# EAGLE board MEMS-preamp_v06 (EAGLE 8.5.0)
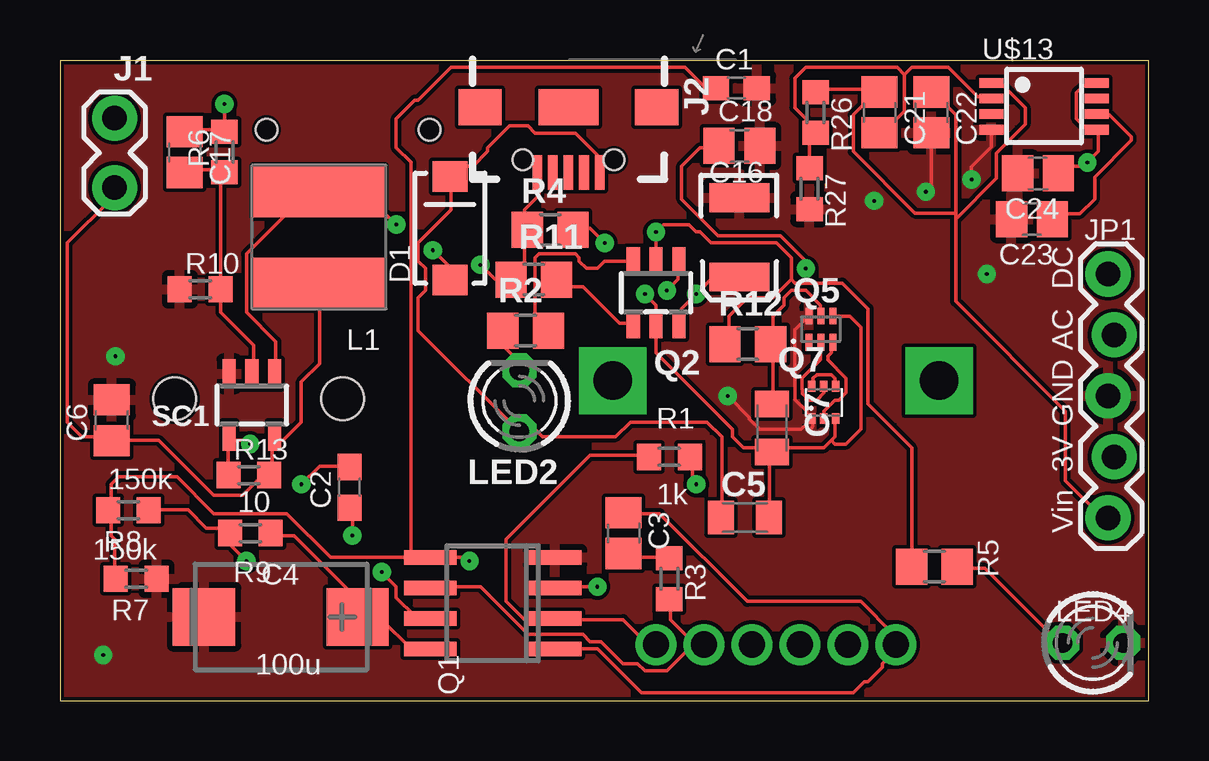
[diagram p0: board, top side]
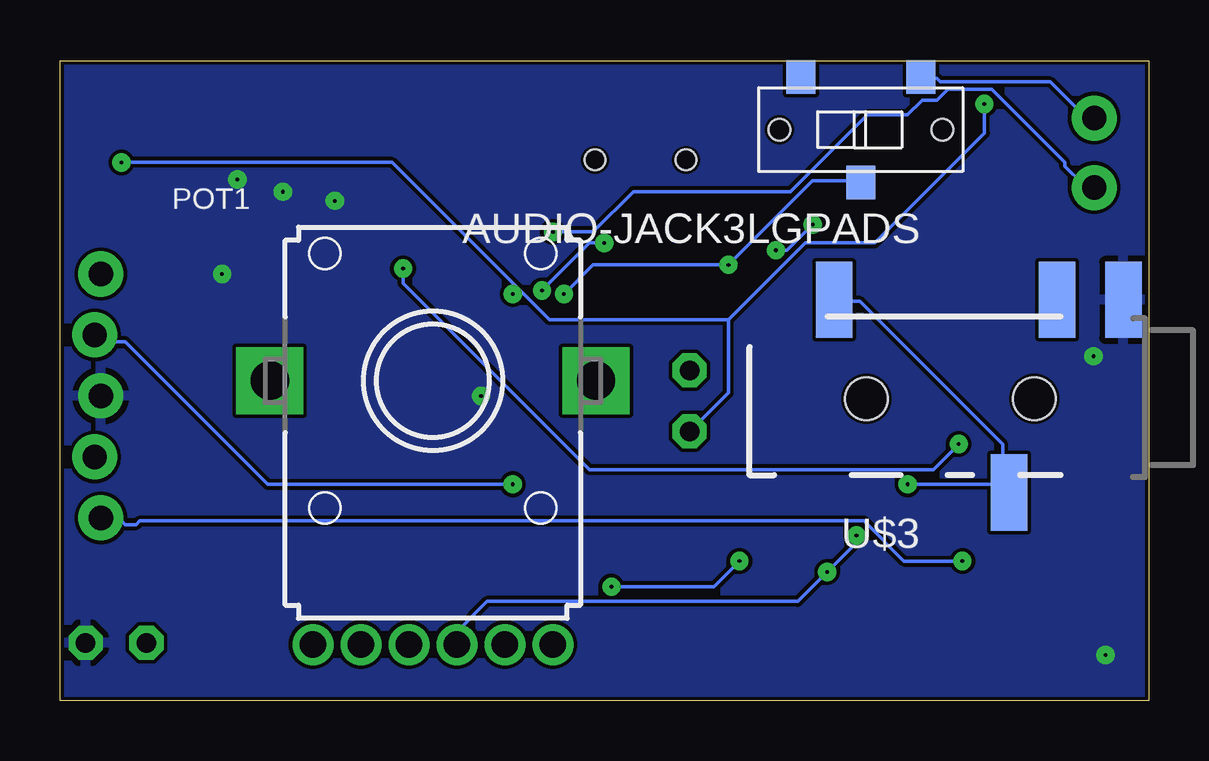
[diagram p1: board, bottom side, seen from below]

Size 45.39 x 26.66 mm. Coordinates in mm from the lower left corner, seen from the top.
Outline: 0,0 45.39,0 45.39,26.66 0,26.66 0,0
Copper layers (1*16): Top 0.035mm / dielectric 1.5mm / Bottom 0.035mm
Design rules "default *": minimum track width 6mil, minimum drill 6mil, track to track 6mil, track to pad 6mil, pad to pad 6mil, via to via 6mil, smd to smd 6mil, copper to edge 6mil, drill to drill 6mil, minimum pad ring 12mil, minimum via ring 12mil, stop-mask expansion 4mil, vias tented up to drill 0mil, thermal gap 10mil

## Footprints (pad centres in the part's own frame; a part is rotated, then mirrored left to right if it is on the bottom)
C0603 = smd 1.1 x 1: 1 -0.85,0; 2 0.85,0
C0805 = smd 1.3 x 1.5: 1 -0.85,0; 2 0.85,0
CT7343 = smd 2.6 x 2.4: + -3.2,0; - 3.2,0
C0805K = smd 1.1 x 1.4: 1 -1,0; 2 1,0
EIA3528 = smd 1.2 x 2.5: A 1.65,0; C -1.65,0
SMA-DIODE = smd 1.27 x 1.47: A -2.15,0; C 2.15,0
1X02_LOCK = drill 1.016 pad 1.88: 1 -0.178,0; 2 2.718,0
USB-B-MICRO-SMD_RED_PASTE = smd 1.45 x 0.4: D+ 2.725,0; D- 2.725,0.65; GND 2.725,-1.3; ID 2.725,-0.65; VBUS 2.725,1.3 | smd 1.5 x 1.8: SHIELD1 0,3.685; SHIELD2 0,-3.685 | smd 1.5 x 2.5: SHIELD3 0,0 | hole 0.85: 2.2,1.9; 2.2,-1.9
1X05_LOCK = drill 1.016 pad 1.88: 1 0,0.127; 2 2.54,-0.127; 3 5.08,0.127; 4 7.62,-0.127; 5 10.16,0.127
CR54 = smd 5.5 x 2.15: P$1 0,1.92; P$2 0,-1.92
LED3MM = drill 0.813 octagon: A -1.27,0; K 1.27,0
PTV112 = drill 1.1 pad 1.676: 1.1 -3,-11; 1.2 -5,-11; 1.3 5,-11; 2.1 -1,-11; 2.2 1,-11; 2.3 3,-11 | drill 1.6 pad 2.8 square: M1 -6.8,0; M2 6.8,0
SO08 = smd 0.6 x 2.2: 1 -1.905,-2.6; 2 -0.635,-2.6; 3 0.635,-2.6; 4 1.905,-2.6; 5 1.905,2.6; 6 0.635,2.6; 7 -0.635,2.6; 8 -1.905,2.6
SOT23-6 = smd 0.55 x 1.2: 1 -0.95,-1.3; 2 0,-1.3; 3 0.95,-1.3; 4 0.95,1.3; 5 0,1.3; 6 -0.95,1.3
WSON-6 = smd 0.3 x 0.7: 1 -0.5,-0.55; 2 0,-0.55; 3 0.5,-0.55; 4 0.5,0.55; 5 0,0.55; 6 -0.5,0.55
SOT-563 = smd 0.3 x 0.45: 1 -0.5,-0.675; 2 0,-0.675; 3 0.5,-0.675; 4 0.5,0.675; 5 0,0.675; 6 -0.5,0.675
R0603 = smd 1 x 1.1: 1 -0.85,0; 2 0.85,0
R0805 = smd 1.3 x 1.5: 1 -0.95,0; 2 0.95,0
SOT23-5 = smd 0.55 x 1.2: 1 -0.95,-1.3; 2 0,-1.3; 3 0.95,-1.3; 4 0.95,1.3; 5 -0.95,1.3
SWITCH_SPDT_CL-SB-12B = smd 1.2 x 1.4: P$1 -2.5,-2.2; P$2 0,2.2; P$3 2.5,-2.2 | hole 0.9: -3.4,0; 3.4,0
TRRS_SJ-43514-SMT-TR = smd 1.524 x 3.175: EARTH -2.114,-5.271; RING1 2.644,2.759; RING2 0.66,-5.271; TIP 9.948,-5.271 | hole 1.778: 1.6,-1.15; 8.6,-1.15
MSOP-8 = smd 0.4 x 1: 1 -0.975,-2.2; 2 -0.325,-2.2; 3 0.325,-2.2; 4 0.975,-2.2; 5 0.975,2.2; 6 0.325,2.2; 7 -0.325,2.2; 8 -0.975,2.2

## Placement (x,y rotation side)
C1  10uF  [C0603]  28.19,25.53 0 top
C2  10uF  [C0603]  12.06,8.89 90 top
C3  10uF  [C0805]  23.5,6.98 270 top
C4  100u  [CT7343]  9.21,3.49 180 top
C5  10uF  [C0805K]  28.55,7.63 0 top
C6  10uF  [C0805]  2.16,11.68 90 top
C7  0.1uF  [C0805K]  29.68,11.37 270 top
C16  68uF  [EIA3528]  28.32,19.3 270 top
C17  2.2pf  [C0805]  5.21,22.86 270 top
C18  56nf  [C0805]  28.32,23.11 0 top
C21  10nF  [C0805]  34.16,24.51 270 top
C22  10uF  [C0805]  36.32,24.51 270 top
C23  10nF  [C0805]  40.51,20.07 180 top
C24  10uF  [C0805]  40.77,21.97 180 top
D1  10BQ015  [SMA-DIODE]  16.26,19.69 90 top
J1  Battery  [1X02_LOCK]  2.28,21.56 90 top
J2  [USB-B-MICRO-SMD_RED_PASTE]  21.19,24.73 270 top
JP1  Adafruit-SPW2430  [1X05_LOCK]  43.81,7.62 90 top
L1  2.7uH  [CR54]  10.79,19.3 180 top
LED2  [LED3MM]  19.15,12.49 90 top
LED4  [LED3MM]  43.05,2.41 0 top
POT1  50k  [PTV112]  29.84,13.33 0 bottom
Q1  OPA2134  [SO08]  18.03,4.06 90 top
Q2  BQ21040  [SOT23-6]  24.85,17 180 top
Q5  BQ297X  [WSON-6]  31.72,15.48 0 top
Q7  DMN2400  [SOT-563]  31.84,12.43 0 top
R1  1k  [R0603]  25.4,10.16 180 top
R2  1k  [R0805]  19.41,15.42 0 top
R3  1k  [R0603]  25.4,5.08 270 top
R4  10k  [R0805]  20.43,19.62 0 top
R5  390  [R0805]  36.45,5.59 180 top
R6  1M  [R0603]  6.86,22.86 90 top
R7  150k  [R0603]  3.17,5.08 180 top
R8  150k  [R0603]  2.86,7.94 0 top
R9  10  [R0603]  7.94,6.98 180 top
R10  100k  [R0603]  5.84,17.15 0 top
R11  10k  [R0805]  19.75,17.54 0 top
R12  330  [R0805]  28.67,14.86 0 top
R13  15k  [R0603]  7.87,9.4 0 top
R26  91.2k  [R0603]  31.5,24.51 270 top
R27  100k  [R0603]  31.24,21.34 270 top
SC1  VREG12_SOT23-5  [SOT23-5]  8,12.32 180 top
SW1  SPDT  [SWITCH_SPDT_CL-SB-12B]  12.01,23.8 180 bottom
U$3  AUDIO-JACK3LGPADS  [TRRS_SJ-43514-SMT-TR]  3.17,11.43 180 bottom
U$13  TPS7A49  [MSOP-8]  41.02,24.77 270 top

## Library data of the parts
C1-C3 C5-C7 C17 C18 C21-C24 = adafruit
C4 = rcl
C16 D1 L1 = SparkFun
J1 = SparkFun-Connectors; G: -; V: +
J2 = SparkFun-Connectors; PROD_ID: CONN-11752
JP1 = SparkFun-Connectors; CON1: Vin; CON2: 3V; CON3: GND; CON4: AC; CON5: DC
LED2 LED4 = led
POT1 = CMU-ArtFab; AVAILABILITY: Unavailable; DESCRIPTION: Alt# Tce-10111410; MF: STMicroelectronics; MP: PTV112; PACKAGE: None; PRICE: None
Q1 = linear; IC_NAME: OPA2134
Q2 Q5 Q7 R1-R13 R26 R27 SC1 SW1 U$3 U$13 = CMU-ArtFab

## Nets
+12V: C21.1 C22.1 JP1.1 R8.2 R9.2 R26.1 U$13.1
GND: C1.2 C4.- C6.2 C16.C C18.2 C22.2 C23.2 C24.2 JP1.3 LED4.K Q1.4 Q5.6 Q7.1 R7.1 R10.1 R27.2 SC1.3 U$3.EARTH U$13.4
GND2: C5.2 C7.2 J2.GND Q2.5 Q5.4 Q7.3 R4.1 R11.1 SW1.P$2
GROU[: POT1.2.3 Q1.6 R3.2
N$1: C4.+ Q1.8 R9.1
N$2: LED4.A R5.1
N$3: JP1.4 R1.1
N$4: C3.2 R3.1
N$5: POT1.1.3 Q1.2 R1.2
N$6: J1.2 SW1.P$1
N$7: C2.2 U$3.RING1 U$3.TIP
N$8: C1.1 Q1.3 Q1.5 R7.2 R8.1
N$9: C3.1 POT1.1.2 Q1.1
N$10: C2.1 POT1.2.2 Q1.7
N$11: LED2.K R2.1
N$12: D1.A L1.P$2 SC1.1
N$13: C18.1 R13.1 SC1.4
N$14: C17.2 R6.1 R10.2 SC1.2
N$15: Q2.3 R2.2
N$16: Q2.1 R4.2
N$17: Q2.4 R11.2
N$18: C7.1 Q5.5 R12.2
N$19: Q7.4 Q7.6
N$20: Q5.2 Q7.5
N$22: Q5.3 Q7.2
N$47: C21.2 R26.2 R27.1 U$13.2
N$48: C23.1 U$13.6
V+: C5.1 C16.A C17.1 C24.1 D1.C J2.VBUS LED2.A Q2.6 R6.2 U$13.5 U$13.8
VBAT: C6.1 J1.1 L1.P$1 Q2.2 R5.2 R12.1 R13.2 SC1.5

## Tracks (layer width: path | path; a pad name or v marks a point on that pad's centre or on a via)
+12V  (via drill 0.15)
  Top 0.152: 33.53,25.48 34.14,25.48 C21.1 33.53,25.48 | 33.53,25.48 31.55,25.48 R26.1 | U$13.1 38.86,25.63 39.32,25.63 40.23,24.71 40.23,24.01 39.04,22.82 39.04,21.77 37.34,20.07 | C22.1 36.42,25.32 37.34,24.41 37.34,20.32 | 33.53,25.48 33.53,24.87 33.07,24.41 33.07,22.89 35.64,20.32 37.34,20.32 | R8.2 3.81,7.95 5.33,7.95 6.1,7.19 6.86,7.19 7.01,7.04 R9.2 7.16,6.88 7.16,6.43 v7.77,5.82 | 37.34,20.07 37.34,16.64 41.91,12.06 41.91,9.17 43.59,7.49 JP1.1 | 37.34,20.07 37.34,20.32
  Bottom 0.152: v7.77,5.82 10.21,5.82 11.89,7.49 42.06,7.49 42.22,7.34 42.67,7.34 42.82,7.49 43.59,7.49 JP1.1
GND  (via drill 0.15)
  Top 0.152: 31.34,11.38 31.39,11.46 31.39,11.61 Q7.1 31.12,11.55 | v27.84,12.7 28.75,11.79 28.75,11.72 29.17,11.3 30.88,11.3 31.12,11.55 | 31.12,11.55 31.12,12.06 30.63,12.55 30.63,15.45 Q5.6 | v36.09,21.21 36.32,21.44 C22.2 | v38,21.72 38,22.25 38.82,23.07 U$13.4
  other vias: 2.31,14.35 1.8,1.91 33.93,20.83 38.63,17.78
  pour Bottom: -2.54,-1.91 47.62,-1.91 47.62,28.58 -2.54,28.58
  pour Top: -1.27,27.31 46.35,27.31 46.35,-0.64 -1.27,-0.64
GND2  (via drill 0.15)
  Top 0.152: J2.GND 19.96,21.97 19.96,21.06 19.36,20.45 19.36,19.69 R4.1 19.36,19.53 19.36,18.01 18.9,17.55 R11.1 18.75,17.55 18.14,17.55 v17.53,18.16 | 32.16,10.85 31.85,10.54 29.87,10.54 29.72,10.39 C7.2 | 32.16,10.85 32.31,11 32.31,11.61 Q7.3 | 32.16,10.85 32.31,10.69 32.77,10.69 33.38,11.3 33.38,15.57 32.92,16.03 32.31,16.03 Q5.4 | C7.2 29.57,10.39 29.41,10.54 28.5,10.54 28.04,11 28.04,11.3 24.84,14.5 24.84,15.57 Q2.5 24.84,15.72 24.84,16.48 v24.38,16.94 | C5.2 29.57,7.64 29.57,10.24 C7.2
  Bottom 0.152: SW1.P$2 12.04,21.67 14.02,21.67 v17.53,18.16 23.16,18.16 v24.38,16.94
GROU[
  Top 0.152: 26.52,2.46 26.82,2.46 POT1.2.3 26.52,2.46 | 26.52,2.46 26.36,2.46 25.45,3.38 25.45,4.14 R3.2 | 26.52,2.46 25.3,1.25 24.38,1.25 24.08,1.55 23.47,1.55 22.55,2.46 22.1,2.46 21.79,2.77 19.51,2.77 17.53,4.75 15.54,4.75 Q1.6
N$1
  Top 0.152: R9.1 8.84,6.88 9.75,6.88 12.34,4.29 12.34,3.53 C4.+ 12.5,3.38 13.41,3.38 14.63,2.16 Q1.8
N$2
  Top 0.152: R5.1 37.49,5.51 38.56,5.51 41.76,2.31 LED4.A
N$3  (via drill 0.15)
  Top 0.152: v26.52,9.02 26.36,9.17 26.36,10.08 R1.1
  Bottom 0.152: v26.52,9.02 36.73,9.02 42.67,14.96 43.74,14.96 43.89,15.11 JP1.4
N$4
  Top 0.152: R3.1 25.3,5.97 23.77,5.97 23.62,6.12 C3.2
N$5
  Top 0.152: R1.2 24.54,10.24 22.1,10.24 18.59,6.73 18.59,4.14 19.36,3.38 20.57,3.38 Q1.2 20.73,3.38 23.47,3.38 24.38,2.46 24.84,2.46 POT1.1.3
N$6
  Bottom 0.152: SW1.P$1 9.45,25.93 8.84,25.93 8.69,25.78 4.12,25.78 2.74,24.41 2.29,24.41 J1.2
N$7  (via drill 0.15)
  Top 0.152: v10.06,9.02 10.82,9.78 12.04,9.78 C2.2
  Bottom 0.152: v10.06,9.02 6.25,9.02 6.1,8.87 | 6.1,8.87 5.94,8.71 U$3.RING1 6.1,8.87 | 6.1,8.87 6.1,10.69 12.04,16.64 13.11,16.64 U$3.TIP
N$8  (via drill 0.15)
  Top 0.152: R7.2 2.29,5.21 2.29,6.73 2.13,6.88 2.13,7.8 R8.1 2.13,7.95 2.13,9.02 2.44,9.32 4.88,9.32 6.4,7.8 9.45,7.8 11.28,5.97 14.33,5.97 14.63,6.27 | 14.63,6.27 14.63,22.43 14.02,23.04 14.02,24.26 14.78,25.02 14.94,25.02 16.31,26.39 26.06,26.39 26.82,25.63 27.28,25.63 C1.1 | 14.63,6.27 14.94,5.97 Q1.5 16.92,5.97 v17.07,5.82 | v22.4,4.75 20.73,4.75 Q1.3
  Bottom 0.152: v22.4,4.75 18.14,4.75 v17.07,5.82
N$9
  Top 0.152: C3.1 23.62,7.8 24.99,7.8 28.65,4.14 33.38,4.14 34.75,2.77 34.75,2.46 POT1.1.2 34.75,2.31 34.75,2.01 34.29,1.55 34.29,1.4 33.68,0.79 33.53,0.79 33.07,0.33 24.23,0.33 22.4,2.16 Q1.1
N$10  (via drill 0.15)
  Top 0.152: v12.19,6.88 12.19,7.95 C2.1 | v13.41,5.36 14.02,4.75 14.02,4.29 14.78,3.53 15.39,3.53 Q1.7
  Bottom 0.152: v12.19,6.88 12.19,6.58 v13.41,5.36 14.63,4.14 27.58,4.14 28.8,2.92 28.8,2.46 POT1.2.2
N$11
  Top 0.152: R2.1 18.59,15.27 18.59,14.66 19.05,14.2 19.05,13.89 LED2.K
N$12  (via drill 0.15)
  Top 0.152: SC1.1 8.99,13.74 8.99,14.96 7.77,16.18 7.77,18.62 10.36,21.21 10.67,21.21 L1.P$2 10.82,21.21 12.65,21.21 v14.02,19.84 | v15.54,18.77 16.15,18.16 16.15,17.55 D1.A
  Bottom 0.152: v15.54,18.77 15.09,18.77 v14.02,19.84
N$13  (via drill 0.15)
  Top 0.152: 7.01,10.85 7.01,11 SC1.4 7.01,10.85 | 7.01,10.85 7.01,9.47 R13.1 | v31.09,18.01 31.09,18.31 30.02,19.38 27.43,19.38 25.91,20.9 25.91,22.28 26.67,23.04 27.43,23.04 C18.1 | v7.92,10.69 7.77,10.85 7.01,10.85
  Bottom 0.152: v31.09,18.01 31.09,17.4 23.32,9.63 8.99,9.63 v7.92,10.69
N$14
  Top 0.152: SC1.2 8.08,13.74 8.08,14.81 6.71,16.18 6.71,17.09 R10.2 6.71,17.25 6.71,21.82 6.86,21.97 R6.1 6.86,22.12 5.33,22.12 C17.2
N$15
  Top 0.152: Q2.3 23.77,18.31 22.71,18.31 22.4,18.01 21.95,18.01 21.64,18.31 21.64,18.47 21.49,18.62 19.96,18.62 19.81,18.47 19.81,15.88 20.27,15.42 R2.2
N$16  (via drill 0.15)
  Top 0.152: v25.3,17.09 25.76,17.55 25.76,18.16 Q2.1 | v22.71,19.08 22.1,19.69 21.49,19.69 R4.2
  Bottom 0.152: v25.3,17.09 23.32,19.08 v22.71,19.08
N$17
  Top 0.152: Q2.4 23.77,15.72 23.32,15.72 21.79,17.25 20.88,17.25 20.73,17.4 R11.2
N$18
  Top 0.152: Q5.5 31.7,16.18 31.7,16.48 31.09,17.09 30.48,17.09 30.18,16.79 30.18,16.48 29.72,16.03 29.72,14.96 R12.2 29.72,14.81 29.72,12.37 C7.1
N$19
  Top 0.152: Q7.6 31.39,13.13 31.39,13.44 31.55,13.59 32.16,13.59 32.31,13.44 32.31,13.13 Q7.4
N$20
  Top 0.152: Q7.5 31.85,12.98 31.85,12.83 31.55,12.52 31.09,12.52 31.09,12.66 30.96,12.79 30.96,12.96 30.94,12.98 30.94,13.44 31.7,14.2 31.7,14.81 Q5.2
N$22
  Top 0.152: Q7.2 31.85,11.76 31.85,12.06 32.31,12.52 32.46,12.52 32.77,12.83 32.77,13.44 32,14.2 32,14.35 32.16,14.5 32.16,14.81 Q5.3
N$47
  Top 0.152: R27.1 31.24,23.5 31.39,23.65 R26.2 31.39,23.8 31.09,24.11 31.09,24.26 30.63,24.71 30.63,25.93 31.09,26.39 34.9,26.39 35.2,26.09 | 35.2,26.09 35.51,26.39 37.03,26.39 38.25,25.17 38.71,25.17 U$13.2 | 35.2,26.09 35.2,24.56 34.29,23.65 C21.2
N$48
  Top 0.152: U$13.6 43.28,24.41 43.74,24.41 44.65,23.5 44.65,23.34 43.13,21.82 43.13,20.9 42.52,20.3 41.6,20.3 41.45,20.14 C23.1
V+  (via drill 0.15)
  Top 0.152: J2.VBUS 22.4,22.12 22.4,22.73 21.49,23.65 19.81,23.65 19.51,23.95 18.75,23.95 17.83,23.04 17.83,22.89 17.22,22.28 16.61,22.28 16.31,21.97 D1.C 16.31,21.82 16.31,20.45 14.94,19.08 14.94,18.31 15.24,18.01 15.24,17.09 14.94,16.79 14.94,15.42 19.05,11.3 LED2.A 19.2,11.3 19.81,11.3 20.12,11 23.16,11 23.77,11.61 26.98,11.61 27.58,11 27.58,7.64 C5.1 | Q2.6 25.91,15.72 25.91,16.33 v26.52,16.94 27.13,17.55 28.19,17.55 C16.A | C24.1 41.76,21.97 42.06,22.28 42.67,22.28 v42.82,22.43 43.28,22.89 43.28,23.65 U$13.5 43.13,23.8 42.82,23.8 42.37,24.26 42.37,25.32 42.67,25.63 43.13,25.63 U$13.8 | 6.86,23.8 5.33,23.8 C17.1 | v6.86,24.87 6.86,23.8 | 6.86,23.8 R6.2
  Bottom 0.152: v6.86,24.87 6.86,23.65 11.43,19.08 14.33,19.08 17.53,15.88 | 17.53,15.88 17.53,12.83 19.05,11.3 LED2.A | v42.82,22.43 31.55,22.43 26.21,17.09 | 26.21,17.09 24.99,15.88 17.53,15.88 | v26.52,16.94 26.36,16.94 26.21,17.09
VBAT  (via drill 0.15)
  Top 0.152: 30.48,17.55 30.48,18.47 29.87,19.08 27.13,19.08 26.67,19.53 26.52,19.53 26.21,19.84 25.15,19.84 v24.84,19.53 24.84,18.31 Q2.2 | 30.48,17.55 29.72,16.79 28.65,16.79 27.89,16.03 27.89,15.11 27.74,14.96 R12.1 | 30.48,17.55 30.63,17.4 32.61,17.4 33.68,16.33 33.68,12.37 35.51,10.54 35.51,5.66 R5.2 | 8.84,10.85 8.84,11 SC1.5 8.84,10.85 | 8.84,10.85 8.84,9.47 R13.2 8.69,9.32 8.38,9.32 7.62,8.56 6.4,8.56 4.12,10.85 2.29,10.85 C6.1 2.13,10.85 1.98,11 0.91,11 0.3,11.61 0.3,19.08 2.13,20.9 2.13,21.36 J1.1 | 8.84,10.85 9.3,10.85 10.06,11.61 10.06,13.28 10.82,14.05 10.82,17.25 L1.P$1
  Bottom 0.152: v24.84,19.53 23.16,19.53 21.49,21.21 14.94,21.21 11.73,24.41 10.06,24.41 9.45,25.02 8.84,25.02 8.38,25.48 6.55,25.48 3.5,22.43 3.5,22.28 2.74,21.51 2.29,21.51 J1.1